# EAGLE board Basetta LED V4 singolo (EAGLE 9.6.2)
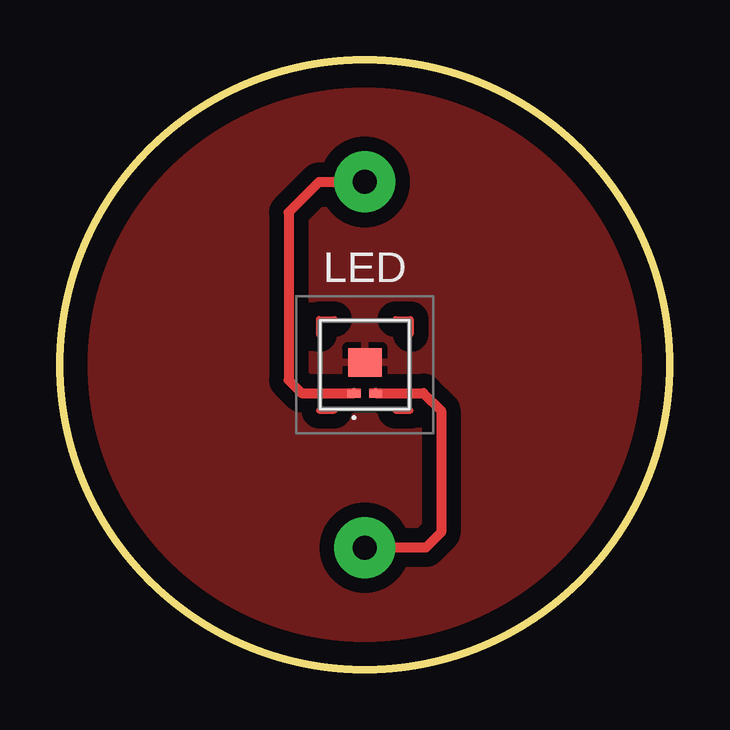
[diagram p0: board, top side]
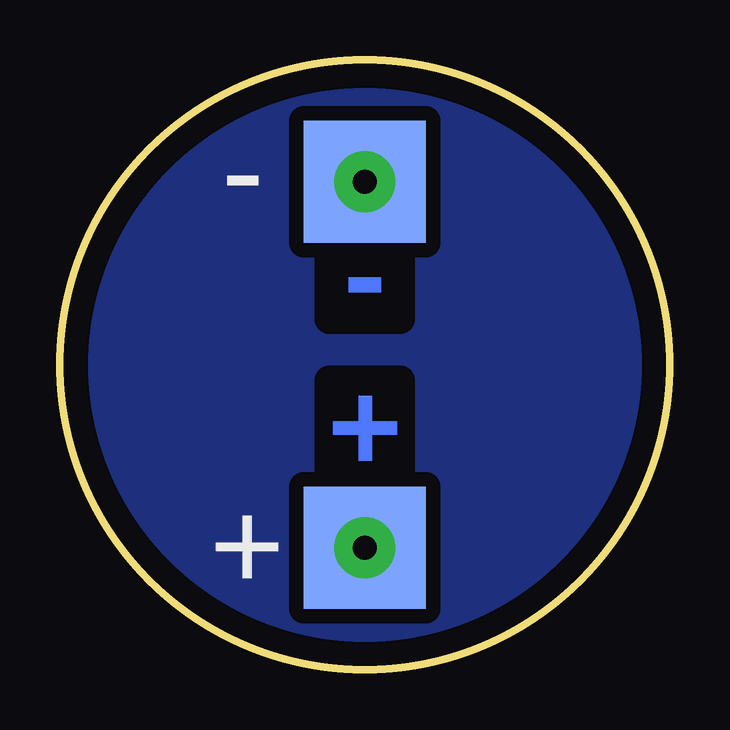
[diagram p1: board, bottom side, seen from below]

Size 25.4 x 25.4 mm. Coordinates in mm from the lower left corner, seen from the top.
Outline: circle at 12.7,12.7 radius 12.7
Copper layers (1*16): Top 0.035mm / dielectric 1.5mm / Bottom 0.035mm
Design rules "default": minimum track width 6mil, minimum drill 0.35mm, track to track 6mil, track to pad 6mil, pad to pad 6mil, via to via 6mil, smd to smd 6mil, copper to edge 40mil, drill to drill 6mil, minimum pad ring 10mil, minimum via ring 8mil, stop-mask expansion 4mil, vias tented up to drill 0mil, thermal gap 10mil

## Footprints (pad centres in the part's own frame; a part is rotated, then mirrored left to right if it is on the bottom)
SMD2,54-5,08 = smd 5.08 x 5.08 bottom: 1 0,0
L1T24080000000000 = smd 0.55 x 0.375: 1 -0.45,-1.175; 2 0.45,-1.175 | smd 1.4 x 1.2: 3 0,0.1

## Placement (x,y rotation side)
E$5  [SMD2,54-5,08]  12.7,5.08 0 top
E$6  [SMD2,54-5,08]  12.7,20.32 0 top
LED  [L1T24080000000000]  12.7,12.7 0 top

## Library data of the parts
E$5 E$6 = wirepadFP
LED = SamacSys_Parts

## Nets
S$1: LED.3
S$2: E$5.1 LED.2
S$3: E$6.1 LED.1

## Tracks (layer width: path | path; a pad name or v marks a point on that pad's centre or on a via)
GND
  pour Bottom (isolate 0.61, no thermals): 1.27,19.05 7.62,25.4 8.89,25.4 17.78,25.4 25.4,17.78 25.4,7.62 17.78,0 7.62,0 0,7.62 0,17.78
S$1
  pour Top (isolate 0.61): -2.54,26.67 26.67,26.67 26.67,-1.27 -2.54,-1.27
S$2  (via drill 1 pad 2.54)
  Top 0.406: LED.2 15.15,11.52 15.88,10.8 15.88,5.71 15.24,5.08 E$5.1
  other vias: 12.7,5.08
S$3  (via drill 1 pad 2.54)
  Top 0.406: E$6.1 10.8,20.32 9.53,19.05 9.53,12.06 10.07,11.52 LED.1
  other vias: 12.7,20.32
S$4
  Top 0.254: 10.8,13.97 10.8,14.6 11.43,14.6
S$5
  Top 0.254: 13.97,14.6 14.61,14.6 14.61,13.97
S$6
  Top 0.254: 10.8,10.8 11.43,10.8
S$7
  Top 0.254: 13.97,10.8 14.61,10.8

## Text on the board
Bottom: - | +
bNames: - | +